# Altium PCB Tube03.PcbDoc (part 2 of 2)
Units mil, origin at the board's own origin, x right, y up, seen from the top; angles counter-clockwise.
Board outline 3701.35 x 3701.35 mil, 2 copper layers (Top Layer, Bottom Layer); 116 components, 79 nets, 440 pads, 68 vias.
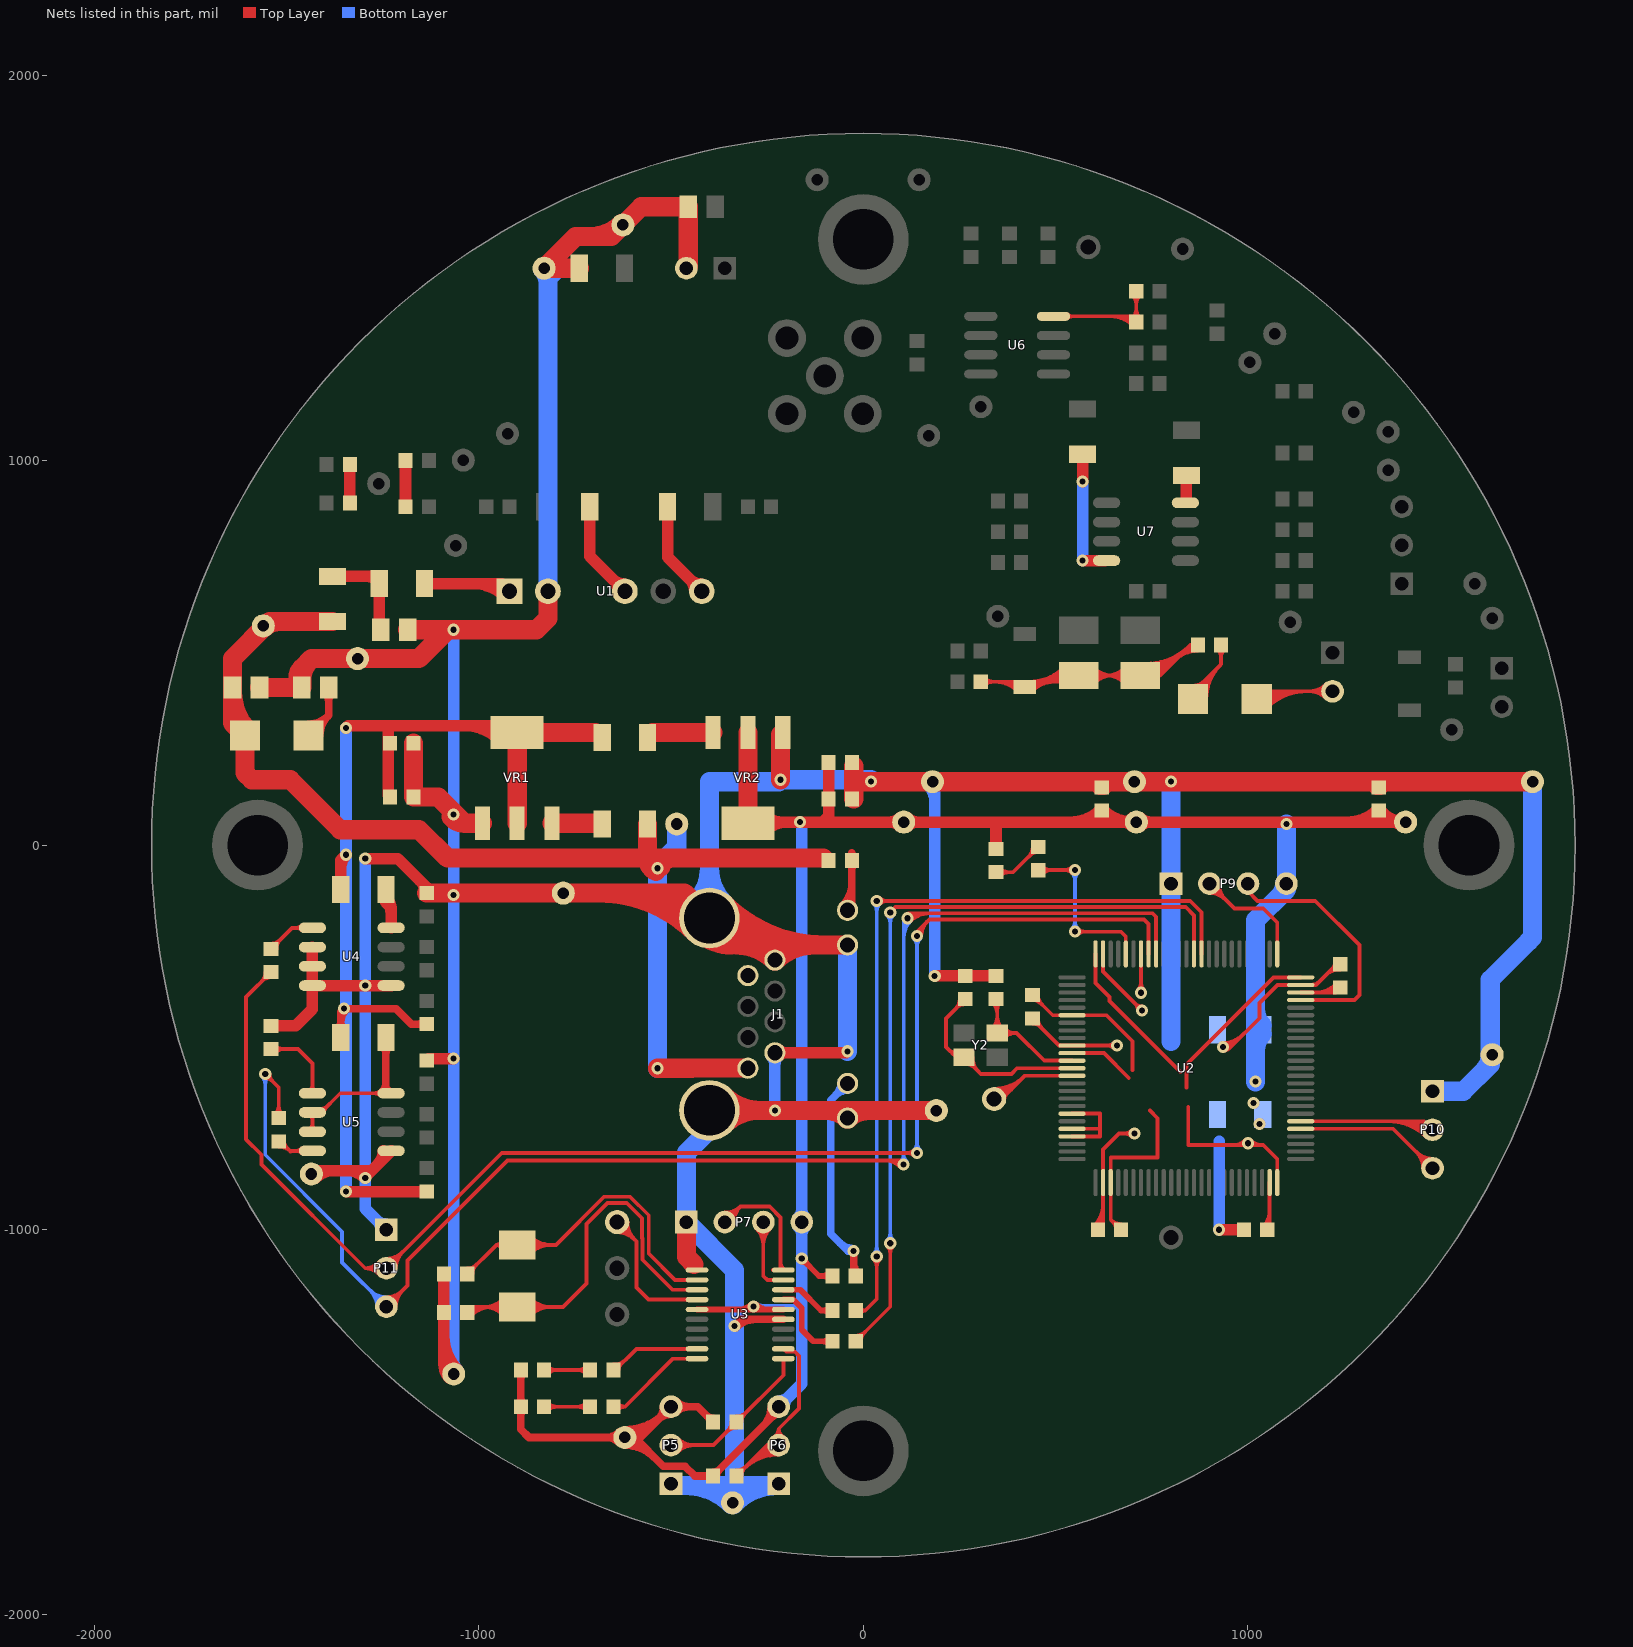
[diagram p2: the nets of this part, all layers, seen from the top]

## Via types
v1: diameter 31.5, hole 15.75, Top Layer to Bottom Layer, 68 vias

## Nets (pads, with @x,y where several pads share a name; then routed paths per layer and width w, separated by ;. In a path a pad name is that pad's centre, name@x,y a point inside that pad or via, vN(x,y) a via of type N, cw(c..) or ccw(c..) an arc to the next point about the centre after c; other vN are vias at no path point) (continued)
GND: C6.1 C7.1 C8.1 C9.1 C11.1 C13.1 C20.2 C21.2 C22.2 C23.2 C24.1 C25.1 C26.1 C27.1 C28.1 C29.1 C30.2 C31.2 FB1.1 J1.2 J1.8 J1.9 J1.11 J1.13 J1.14 P2.2 P5.1 P6.1 P7.1 P9.1 P10.1 P11.1 pad.0@1635,-545 pad.0@-830,1500 pad.1@-1065,-1375 pad.3@705,165 pad.4 pad.5 pad.6@-625.04,1612.52 pad.7@-340,-1710 pad.20 pad.22 R9.1 R10.1 R11.1 R14.1 R30.1 U1.2 U2.10 U2.27 U2.74 U2.94 U2.99 U3.1 U3.15 U4.2 U4.3 U4.4 U4.5 U5.5 VR1.1 VR2.1 | length 21622.8
  Top Layer w10: C21.2@440,-450.32 440,-451.78 509.17,-520.94 U2.10@542.76,-520.94 v1(660,-520.94) ; C21.2@440.98,-463.62 cw(c440.98,-489.85) 459.53,-471.3 ; C21.2@454.29,-450.32 ccw(c492.32,-450.32) 465.43,-477.21 ; 505.7,-517.48 ccw(c512.83,-510.34) U2.10@512.83,-520.43 ; C23.2@600.28,-989.61 ccw(c544.3,-933.63) 623.46,-933.63 ; C23.2@607.35,-996.68 ccw(c568.44,-957.77) 623.46,-957.77 ; C23.2@609.69,-1000 623.46,-986.22 U2.27@623.46,-877.24 623.46,-791.54 665,-750 v1(705,-750) ; C23.2@614.42,-1003.75 ccw(c592.58,-981.91) C23.2@623.46,-981.91 ; U2.99@623.46,-282.76 623.46,-328.46 v1(724.84,-429.84) ; v1@652.4,-528.54 ccw(c634.05,-546.89) 634.05,-520.94 ccw(c634.05,-495) v1@652.4,-513.34 ; v1@697.4,-757.6 ccw(c679.05,-775.95) 679.05,-750 ccw(c679.05,-724.05) v1@697.4,-742.4 ; v1@714.09,-429.84 ccw(c688.14,-429.84) 706.49,-411.49 ccw(c724.84,-393.14) v1@724.84,-419.09 ; v1@714.29,-376.08 ccw(c695.94,-357.73) 721.89,-357.73 ccw(c747.84,-357.73) v1@729.49,-376.08 ; v1(721.89,-383.68) U2.94@721.89,-282.76 ; v1@935,-534.25 ccw(c935,-508.3) 953.35,-526.65 ; v1(935,-525) 955,-525 ; v1@935,-524.25 ccw(c935,-474.16) 970.42,-509.58 ; v1@935,-514.25 ccw(c935,-440.02) 987.49,-492.51 ; v1@943.96,-530.93 cw(c955,-538.23) 955,-525 ; v1@943.96,-519.07 ccw(c955,-511.77) 955,-525 ; U2.74@1167.17,-362.95 ccw(c1167.17,-339.09) 1184.04,-355.96 ; 1201.45,-338.55 cw(c1239.02,-376.12) C27.1@1239.02,-322.99 ; 1218.52,-321.48 cw(c1239.02,-341.98) C27.1@1239.02,-312.99 ; C27.1@1222.45,-317.55 ccw(c1214.59,-309.68) C27.1@1225.71,-309.68 ; C27.1@1240,-309.68 1230.32,-309.68 1176.54,-363.46 U2.74@1137.24,-363.46 1076.54,-363.46 1030,-410 1030,-450 955,-525
  Top Layer w20: v1(-335,-1250) -317.8,-1232.8 U3.15@-207.8,-1232.8 ; v1@-330.94,-1254.06 cw(c-279.59,-1305.41) -279.59,-1232.8
  Top Layer w30: R10.1@-1540,-469.69 -1475.31,-469.69 -1432.36,-426.73 U4.4@-1432.36,-365 ; U4.2@-1432.36,-265 U4.3@-1432.36,-315 U4.4@-1432.36,-365 ; pad.5@-1424.39,-865.61 cw(c-1377.5,-912.5) -1377.5,-846.18 ; pad.5@-1423.82,-846.18 -1278.82,-846.18 ; -1342.24,-846.18 cw(c-1342.24,-912.24) v1@-1295.53,-865.53 ; v1(-1295,-865) -1295,-862.36 -1278.82,-846.18 ; v1(-1295,-35) -1210,-35 -1135,-110 R9.1@-1135,-124.69 ; -1262.52,-829.88 ccw(c-1297.4,-795) U5.5@-1248.07,-795 ; U5.5@-1227.64,-795 -1278.82,-846.18 ; U4.5@-1227.64,-365 v1(-1295,-365) U4.4@-1432.36,-365 ; -1152.71,-92.29 cw(c-1185.11,-124.69) R9.1@-1139.29,-124.69 ; R11.1@-1131.68,-562.02 cw(c-1114.72,-578.98) -1114.72,-555 ; R11.1@-1130.31,-555 v1(-1065,-555) ; -1090.31,-1350.1 ccw(c-1040.1,-1350.1) pad.1@-1075.61,-1385.61 ; -1090.31,-1277.67 ccw(c-967.67,-1277.67) pad.1@-1054.39,-1364.39 ; C29.1@-1090.31,-1115 C28.1@-1090.31,-1215 -1090.31,-1349.69 pad.1@-1065,-1375 ; J1.2@-229.92,-539.84 v1@-44.84,-539.84 ; J1.2@-221.04,-548.72 cw(c-199.6,-570.16) -199.6,-539.84 cw(c-199.6,-509.52) J1.2@-221.04,-530.96 ; v1(185.63,-340) 185.31,-339.69 C25.1@345,-339.69 ; v1(925,-1000) C26.1@989.68,-1000
  Top Layer w50: C13.1@-1569.96,410 R14.1@-1460.04,410 -1460.04,459.96 ; R14.1@-1462.2,416.03 cw(c-1369.2,419.2) -1435,485 ; R14.1@-1461.68,414.69 cw(c-1436.52,436.44) -1460.04,459.96 ; C11.1@-1184.96,560 v1@-1080,560 ; C7.1@-1169.68,265 C6.1@-1169.68,125 -1105,125 -1036.89,56.89 ; R9.1@-1135,-124.69 -464.76,-124.69 J1.14@-400,-189.45 -329.92,-259.53 ; v1@-1072.34,74.37 ccw(c-1036.89,101.58) -1036.89,56.89 ; v1@-1071.54,73.46 ccw(c-1031.54,113.46) -1031.54,56.89 ; VR1.1@-990.55,56.89 -1036.89,56.89 ; U1.2@-820,660 -820,590 -850,560 v1(-1065,560) v1@-1080,560 ; R30.1@-738.66,1500 pad.0@-830,1500 -747.81,1582.19 -655.36,1582.19 -577.55,1660 FB1.1@-455.04,1660 P2.2@-455.04,1504.96 ; -710.33,1582.19 ccw(c-710.33,1697.81) pad.6@-628.57,1616.05 ; -686.09,-124.69 cw(c-686.09,-475.54) J1.14@-438,-227.45 ; -565.38,-124.69 cw(c-565.38,-354.83) J1.14@-402.64,-192.09 ; P7.1@-460,-980 -460,-1070 -440,-1090 ; J1.14@-432.71,-222.16 ccw(c-342.49,-131.94) -342.49,-259.53 ; J1.13@-400,-689.45 pad.22@190,-690 ; J1.14@-397.36,-186.8 ccw(c-221.78,-11.23) -221.78,-259.53 ; J1.13@-362.04,-727.48 cw(c-270.38,-819.31) -270.26,-689.57 cw(c-270.14,-559.83) J1.13@-361.96,-651.48 ; J1.14@-362,-151.45 ccw(c-101.07,109.48) -101.07,-259.53 ; J1.8@-231.75,-300.69 ccw(c-329.91,-397.16) -329.91,-259.53 ; J1.8@-229.92,-298.9 -229.92,-259.61 ; J1.8@-228.11,-300.71 cw(c-128.7,-400.12) -128.7,-259.53 ; v1(-215,170) VR2.1@-215,287.56 ; -94.77,-689.73 cw(c-94.84,-763.32) J1.9@-42.76,-711.34 ; J1.11@-40.94,-259.53 -329.92,-259.53 ; J1.9@-39.14,-711.34 cw(c12.85,-763.42) 12.92,-689.83 ; C8.1@-25,120 -25,165 ; C9.1@-25,205 -25,165 ; 599.72,165 cw(c599.72,131.02) C20.2@623.75,155.05 ; C20.2@616.25,155.05 cw(c640.28,131.02) 640.28,165 ; 1319.72,165 cw(c1319.72,131.02) C22.2@1343.75,155.05 ; C22.2@1336.25,155.05 cw(c1360.28,131.02) 1360.28,165 ; pad.20@1740,165 v1(800,165) v1(20,165) -25,165 ; -1460.04,459.96 -1435,485 ; -1435,485 -1155,485 v1@-1080,560
  Bottom Layer w30: v1(-1295,-35) v1(-1295,-365) v1(-1295,-865) -1295,-945 P11.1@-1240,-1000 ; P11.1@-1254.53,-1000 ccw(c-1289.6,-1000) -1264.8,-975.2 ccw(c-1240,-950.4) P11.1@-1240,-985.47 ; pad.1@-1075.61,-1364.39 ccw(c-1101.21,-1338.79) -1065,-1338.79 ccw(c-1028.79,-1338.79) pad.1@-1054.39,-1364.39 ; pad.1@-1065,-1375 v1(-1065,-555) v1(-1065,-130) v1(-1065,80) v1(-1065,560) ; J1.2@-238.8,-548.72 cw(c-260.24,-570.16) -229.92,-570.16 cw(c-199.6,-570.16) J1.2@-221.04,-548.72 ; v1@-229.92,-689.92 J1.2@-229.92,-539.84 ; pad.4@169.39,154.39 cw(c130.2,115.2) 185.63,115.2 ; pad.4@185,165 185.63,164.37 v1(185.63,-340) ; v1(925,-1000) 925,-770
  Bottom Layer w50: pad.0@-833.54,1496.46 cw(c-866.21,1463.79) -820,1463.79 ; U1.2@-820,660 -820,1475 -795,1500 ; P5.1@-500,-1660 -495,-1665 -340,-1665 ; -460.71,-1665 cw(c-460.71,-1830.71) pad.7@-343.54,-1713.54 ; J1.14@-438,-151.45 ccw(c-529.74,-59.71) -400,-59.71 ccw(c-270.26,-59.71) J1.14@-362,-151.45 ; J1.13@-400,-689.45 -400,-740 -460,-800 P7.1@-460,-980 -335,-1105 v1(-335,-1250) -335,-1665 ; J1.14@-400,-189.45 -400,165 -220,165 v1(-215,170) v1@20,170 ; -372.91,-1679.31 cw(c-340,-1710) -340,-1665 ; pad.7@-340,-1710 -340,-1670 -335,-1665 ; pad.7@-336.34,-1713.41 cw(c-225.01,-1817.24) P6.1@-225.01,-1665 ; pad.7@-336.26,-1706.68 cw(c-313.49,-1686.51) -335,-1665 ; -308.18,-1678.18 ccw(c-340,-1710) -340,-1665 ; P6.1@-220,-1660 P6.1@-225,-1665 ; v1(-40.94,-535.94) J1.11@-40.94,-259.53 ; 800,-510 P9.1@800,-100 v1(800,165) ; P10.1@1480,-640 1560,-640 1630,-570 1630,-350 1730.22,-249.78 1730.22,-249.07 1740,-239.29 pad.20@1740,165 ; 1612.32,-587.68 ccw(c1569.64,-545) pad.0@1630,-545 ; -335,-1665 P6.1@-225,-1665
  other v1: -230,-690
LED1_030: D4.K U3.9 | length 293.9
  Top Layer w10: D4.K@-650.43,-1370.43 -640,-1360 -589.57,-1309.57 U3.9@-432.2,-1309.57 ; D4.K@-649.69,-1350.71 ccw(c-649.69,-1304.89) -617.29,-1337.29 ; D4.K@-636.38,-1364.02 cw(c-617.94,-1364.02) -630.98,-1350.98
LED1_407: D9.K U2.96 | length 651.1
  Top Layer w10: D9.K@455.31,-65 v1(550,-65) ; D9.K@465.39,-74.72 cw(c488.87,-98.2) 488.87,-65 ; D9.K@465.39,-55.9 ccw(c487.35,-33.95) 487.35,-65 ; v1@542.4,-72.6 ccw(c524.05,-90.95) 524.05,-65 ccw(c524.05,-39.05) v1@542.4,-57.4 ; v1(550,-225) 670,-225 682.52,-237.52 U2.96@682.52,-282.76 ; v1@557.6,-232.6 cw(c575.95,-250.95) 575.95,-225 cw(c575.95,-199.05) v1@557.6,-217.4
  Bottom Layer w10: v1@542.4,-217.4 ccw(c524.05,-199.05) 550,-199.05 ccw(c575.95,-199.05) v1@557.6,-217.4 ; v1@542.4,-72.6 cw(c524.05,-90.95) 550,-90.95 cw(c575.95,-90.95) v1@557.6,-72.6 ; v1(550,-225) v1(550,-65)
LED2_030: D7.K U3.10 | length 313.8
  Top Layer w10: D7.K@-649.69,-1460 -620,-1460 ; D7.K@-639.75,-1468.85 cw(c-620,-1486.46) -620,-1460 ; D7.K@-639.75,-1451.15 ccw(c-620,-1433.54) -620,-1460 ; U3.10@-432.2,-1335.16 -495.16,-1335.16 -620,-1460
LED_FB: J1.7
NetC1_1: C1.1 C3.2 U6.8 | length 554.7
  Top Layer w10: U6.8@494.49,1375 709.69,1375 C1.1@709.69,1435 ; U6.8@530.8,1370.18 cw(c542.43,1358.56) 542.43,1375 cw(c542.43,1391.44) U6.8@530.8,1379.82 ; 643.72,1375 cw(c643.72,1295.02) C3.2@700.27,1351.57 ; 667.86,1375 cw(c667.86,1319.16) C3.2@707.35,1358.65 ; C3.2@692.01,1375 cw(c692.01,1343.31) C3.2@714.42,1365.72 ; C3.2@694.68,1375 C3.2@709.68,1360 ; C3.2@700.27,1370.39 ccw(c677.55,1393.12) 709.69,1393.12 ccw(c741.81,1393.11) C3.2@719.09,1370.39 ; C1.1@700.28,1429.61 cw(c677.56,1406.89) 709.69,1406.89 cw(c741.81,1406.89) C1.1@719.1,1429.61
NetC11_2: C11.2 L1.1 R15.1 | length 298.4
  Top Layer w30: R15.1@-1380,698.66 -1277.32,698.66 L1.1@-1258.66,680 C11.2@-1258.66,563.62 ; -1289.36,698.66 cw(c-1289.36,662.49) L1.1@-1263.78,688.07 ; -1258.66,593.76 ccw(c-1227.38,593.76) C11.2@-1249.5,571.64
NetC18_1: C18.1 C19.1 D5.2 R31.2 R32.2 | length 2207.4
  Top Layer w10: R32.2@305.32,425 C18.1@544.06,425 ; R32.2@314.73,415.59 cw(c337.44,392.87) 337.44,425 cw(c337.44,457.13) R32.2@314.73,434.41 ; 343.94,425 cw(c343.94,346.85) D5.2@399.2,402.11 ; 368.08,425 cw(c368.08,370.99) D5.2@406.27,409.18 ; D5.2@392.22,425 cw(c392.22,395.13) D5.2@413.34,416.25 ; D5.2@426.66,416.25 cw(c447.78,395.13) D5.2@447.78,425 ; D5.2@432.29,425 ccw(c432.29,552.91) C18.1@522.73,462.46 ; D5.2@433.73,409.18 cw(c471.92,370.99) 471.92,425 ; D5.2@440.8,402.11 cw(c496.06,346.85) 496.06,425 ; 456.43,425 ccw(c456.43,528.77) C18.1@529.8,455.39 ; 480.57,425 ccw(c480.57,504.62) C18.1@536.87,448.32 ; 504.71,425 ccw(c504.71,480.48) C18.1@543.95,441.25 ; C18.1@509.27,425 cw(c509.27,405.96) C18.1@522.73,419.42 ; C18.1@560,440.94 C19.1@720,440.94 770.94,440.94 850,520 ; C18.1@590.2,426.5 cw(c625.08,391.61) 625.08,440.94 cw(c625.08,490.27) C18.1@590.2,455.39 ; C18.1@597.27,419.42 cw(c649.22,367.47) 649.22,440.94 cw(c649.22,514.42) C18.1@597.27,462.46 ; C19.1@682.73,419.42 ccw(c630.78,367.47) 630.78,440.94 ccw(c630.78,514.42) C19.1@682.73,462.46 ; C19.1@689.8,426.5 ccw(c654.92,391.61) 654.92,440.94 ccw(c654.92,490.27) C19.1@689.8,455.39 ; C19.1@735.75,431.38 ccw(c735.75,493.25) 779.5,449.5 ; C19.1@735.75,441.38 ccw(c735.75,527.39) 796.57,466.57 ; C19.1@735.75,451.38 ccw(c735.75,561.53) 813.64,483.64 ; C19.1@735.75,461.38 ccw(c735.75,595.68) 830.71,500.71 ; C19.1@735.75,471.38 ccw(c735.75,629.82) 847.78,517.78 ; 811.68,481.68 cw(c869.68,423.69) R31.2@869.68,505.71 ; 828.76,498.76 cw(c869.68,457.83) R31.2@869.68,515.71 ; 840.16,510.16 cw(c850.44,499.88) R31.2@860.49,510.38 ; 845.83,515.83 cw(c869.68,491.97) R31.2@869.68,525.71 ; 847.39,517.39 cw(c857.51,507.27) R31.2@867.4,517.61 ; R31.2@857.34,515.04 ccw(c850,512.1) 850,520 ; R31.2@857.34,524.96 cw(c850,527.9) 850,520 ; R31.2@869.68,520 850,520
NetC26_2: C26.2 U2.49 | length 185.7
  Top Layer w10: C26.2@1040.9,-989.61 ccw(c1003.17,-951.87) 1056.54,-951.87 ; C26.2@1047.98,-996.68 ccw(c1027.31,-976.01) 1056.54,-976.01 ; C26.2@1050.31,-1000 C26.2@1053.36,-996.95 ; C26.2@1056.54,-993.78 U2.49@1056.54,-877.24
NetC27_2: C27.2 U2.73 | length 230.1
  Top Layer w10: U2.73@1137.24,-383.15 1227.16,-383.15 C27.2@1240,-370.31 ; 1175.9,-383.15 ccw(c1175.9,-307.2) C27.2@1229.61,-360.9 ; 1200.04,-383.15 ccw(c1200.04,-331.34) C27.2@1236.68,-367.98 ; C27.2@1224.19,-383.15 ccw(c1224.19,-355.48) C27.2@1243.75,-375.05
NetD1_1: D1.1 R14.2 | length 306.7
  Top Layer w20: D1.1@-1442.32,285 -1389.96,337.36 R14.2@-1389.96,410 ; D1.1@-1442.32,314.37 ccw(c-1442.32,385.28) -1392.18,335.14 ccw(c-1342.05,285) D1.1@-1412.95,285 ; R14.2@-1399.04,394.82 cw(c-1420.95,372.91) -1389.96,372.91 cw(c-1358.97,372.91) R14.2@-1380.88,394.82
NetD2_K: D2.K R17.1 | length 100
  Top Layer w30: R17.1@-1334.69,890 D2.K@-1334.69,990
NetD3_A: D3.A R16.1 | length 100
  Top Layer w30: D3.A@-1190.32,895 R16.1@-1190.32,995
NetD4_A: D4.A R35.1 | length 220.3
  Top Layer w10: R35.1@-829.69,-1365 D4.A@-710.32,-1365 ; R35.1@-820.28,-1374.41 cw(c-797.56,-1397.13) -797.56,-1365 cw(c-797.56,-1332.87) R35.1@-820.28,-1355.59 ; D4.A@-719.73,-1374.41 ccw(c-742.44,-1397.13) -742.44,-1365 ccw(c-742.44,-1332.87) D4.A@-719.73,-1355.59
NetD7_A: D7.A R36.1 | length 220.3
  Top Layer w10: R36.1@-829.69,-1460 D7.A@-710.32,-1460 ; R36.1@-820.28,-1469.41 cw(c-797.56,-1492.13) -797.56,-1460 cw(c-797.56,-1427.87) R36.1@-820.28,-1450.59 ; D7.A@-719.73,-1469.41 ccw(c-742.44,-1492.13) -742.44,-1460 ccw(c-742.44,-1427.87) D7.A@-719.73,-1450.59
NetD8_1: D8.1 P3.2 | length 741.4
  Top Layer w10: D8.1@1018.7,383.98 cw(c1057.37,345.31) 1057.37,400 cw(c1057.37,414.69) D8.1@1046.98,404.3 ; D8.1@1025.77,376.91 cw(c1081.51,321.17) 1081.51,400 ; D8.1@1032.84,369.84 cw(c1105.65,297.02) 1105.65,400 ; D8.1@1039.91,362.77 cw(c1129.8,272.88) 1129.8,400 ; D8.1@1042.68,400 P3.2@1220,400 ; D8.1@1046.98,355.7 cw(c1153.94,248.74) 1153.94,400 ; P3.2@1202.66,382.66 ccw(c1160.79,340.79) 1160.79,400 ccw(c1160.79,459.21) P3.2@1202.66,417.34 ; P3.2@1209.73,389.73 ccw(c1184.93,364.93) 1184.93,400 ccw(c1184.93,435.07) P3.2@1209.73,410.27
NetD8_2: D8.2 R31.1 | length 531.3
  Top Layer w10: D8.2@857.32,380 857.32,397.32 930.31,470.31 R31.1@930.31,520 ; D8.2@857.32,414.37 ccw(c857.32,455.53) 886.42,426.42 ; D8.2@861.69,380 cw(c914.06,380) D8.2@877.03,417.03 ; D8.2@871.69,380 cw(c948.2,380) 894.1,434.1 ; D8.2@881.69,380 cw(c982.35,380) 911.17,451.17 ; D8.2@891.69,380 cw(c1016.49,380) 928.24,468.24 ; R31.1@920.9,509.61 cw(c898.19,486.89) 930.31,486.89 cw(c962.44,486.89) R31.1@939.72,509.61
NetD9_A: D9.A R43.1 | length 238.1
  Top Layer w10: R43.1@345,-70.31 389.37,-70.31 D9.A@455,-4.68 ; R43.1@355.39,-79.72 cw(c378.11,-102.44) 378.11,-70.31 cw(c378.11,-38.19) R43.1@355.39,-60.9 ; 430.6,-29.08 ccw(c406.21,-4.68) D9.A@440.71,-4.68 ; 432.98,-26.7 cw(c454.02,-47.74) D9.A@454.02,-17.99
NetJ1_10: J1.10 R18.1 | length 683.1
  Top Layer w20: R18.1@-25,-1114.69 v1(-25,-1055) ; -25,-1086.13 ccw(c13.2,-1086.13) R18.1@-13.81,-1113.14
  Bottom Layer w20: -60.42,-1034.58 ccw(c-25,-999.16) v1@-25,-1049.25 ; J1.10@-58.5,-619.37 cw(c-100.89,-619.37) -70.92,-649.35 cw(c-40.94,-679.32) J1.10@-40.94,-636.93 ; J1.10@-40.94,-619.37 -85,-663.43 -85,-1010 -40,-1055 v1(-25,-1055)
NetJ1_12: J1.12 R19.1 | length 278
  Top Layer w20: J1.12@-53.36,-156.95 ccw(c-110.51,-99.8) -29.69,-99.8 ; J1.12@-40.94,-169.37 -29.69,-158.11 -29.69,-20 ; R19.1@-35.56,-46.86 cw(c-49.74,-61.04) -29.69,-61.04 cw(c-9.63,-61.04) R19.1@-23.81,-46.86 ; R19.1@-35.33,-32.92 ccw(c-47.29,-20) -29.69,-20 ; R19.1@-24.04,-32.92 cw(c-12.08,-20) -29.69,-20
NetL1_2: L1.2 U1.1 | length 290
  Top Layer w30: L1.2@-1141.34,680 U1.1@-940,680 ; -1012.86,680 cw(c-1012.86,567.14) U1.1@-933.06,646.94
NetL2_1: L2.1 U1.6 | length 326.7
  Top Layer w30: L2.1@-508.66,880 -508.66,748.66 U1.6@-420,660 ; U1.6@-438.46,660 ccw(c-483.04,660) -451.52,691.52 ccw(c-420,723.04) U1.6@-420,678.46
NetL3_1: L3.1 U1.4 | length 327.9
  Top Layer w30: L3.1@-711.34,880 -711.34,751.34 U1.4@-620,660 ; U1.4@-638.46,660 ccw(c-683.04,660) -651.52,691.52 ccw(c-620,723.04) U1.4@-620,678.46
NetR10_2: R10.2 U5.1 | length 284.2
  Top Layer w10: R10.2@-1540,-530.32 -1469.68,-530.32 -1432.36,-567.64 U5.1@-1432.36,-645 ; R10.2@-1529.61,-539.73 cw(c-1506.89,-562.44) -1506.89,-530.32 cw(c-1506.89,-498.19) R10.2@-1529.61,-520.91 ; U5.1@-1438.57,-638.79 ccw(c-1453.56,-623.8) -1432.36,-623.8 ccw(c-1411.17,-623.8) U5.1@-1426.15,-638.79
NetR12_2: R12.2 VR1.3 | length 128.9
  Top Layer w50: VR1.3@-809.45,56.89 R12.2@-680.55,56.89
NetR13_2: R13.2 VR2.3 | length 157.7
  Top Layer w50: R13.2@-548.23,293.11 VR2.3@-390.55,293.11
NetR25_2: R25.2 U4.8 | length 193
  Top Layer w30: R25.2@-1246.46,-133.31 cw(c-1291.9,-178.75) -1227.64,-178.75 ; R25.2@-1245.04,-134.42 cw(c-1263.22,-165) -1227.64,-165 ; R25.2@-1241.34,-115 -1241.34,-148.66 -1227.64,-162.36 U4.8@-1227.64,-215
NetR26_2: R26.2 U5.2 U5.3 U5.8 | length 634.2
  Top Layer w10: U5.3@-1438.57,-738.79 ccw(c-1453.56,-723.8) -1432.36,-723.8 ccw(c-1411.17,-723.8) U5.3@-1426.15,-738.79 ; U5.2@-1438.57,-701.21 cw(c-1453.56,-716.2) -1432.36,-716.2 cw(c-1411.17,-716.2) U5.2@-1426.15,-701.21 ; U5.3@-1432.36,-745 U5.2@-1432.36,-695 -1410,-695 -1360,-645 U5.8@-1227.64,-645 ; U5.2@-1410.71,-686.22 ccw(c-1410.71,-663.31) -1394.51,-679.51 ; U5.2@-1401.93,-695 cw(c-1382.44,-695) -1396.22,-681.22 ; U5.8@-1255.5,-651.21 ccw(c-1270.49,-666.2) -1270.49,-645 ccw(c-1270.49,-623.8) U5.8@-1255.5,-638.79
  Top Layer w20: U5.8@-1251.96,-642.33 ccw(c-1277.62,-616.67) -1241.34,-616.67 ; R26.2@-1250,-521.85 cw(c-1270.9,-542.75) -1241.34,-542.75 cw(c-1211.78,-542.75) R26.2@-1232.68,-521.85 ; R26.2@-1241.34,-500 -1241.34,-631.3 U5.8@-1227.64,-645
NetR28_2: R28.2 U7.4 | length 334
  Top Layer w30: v1(570,740) U7.4@627.64,740 ; v1(570,945) R28.2@570,1016.34
  Bottom Layer w30: v1(570,740) v1(570,945)
NetR29_2: R29.2 U7.8 | length 68.7
  Top Layer w30: U7.8@840,892.64 R29.2@840,961.34
NRST_030: T1.1 U3.4 | length 524.6
  Top Layer w10: T1.1@-640,-1006.5 cw(c-640,-1070.46) -594.77,-1025.23 cw(c-549.54,-980) T1.1@-613.5,-980 ; T1.1@-640,-996.5 cw(c-640,-1036.32) -611.84,-1008.16 cw(c-583.68,-980) T1.1@-623.5,-980 ; T1.1@-640,-980 -590,-1030 -590,-1150 -558.39,-1181.61 U3.4@-432.2,-1181.61
NRST_407: T5.1 U2.14 | length 447.7
  Top Layer w10: T5.1@340,-660 360,-660 420.32,-599.68 U2.14@542.76,-599.68 ; T5.1@340,-653.5 ccw(c340,-589.54) 385.23,-634.77 ; T5.1@340,-643.5 ccw(c340,-555.39) 402.3,-617.7 ; T5.1@340,-633.5 ccw(c340,-521.25) 419.37,-600.63 ; T5.1@366.5,-660 cw(c382.18,-660) 371.09,-648.91
PA5_030: P5.2 R4.1 U3.11 | length 659.5
  Top Layer w10: P5.2@-500,-1560 -389.69,-1560 R4.1@-329.69,-1500 -207.8,-1378.11 U3.11@-207.8,-1335.16 ; P5.2@-489.73,-1570.27 cw(c-464.93,-1595.07) -464.93,-1560 cw(c-464.93,-1524.93) P5.2@-489.73,-1549.73 ; P5.2@-482.66,-1577.34 cw(c-440.79,-1619.21) -440.79,-1560 cw(c-440.79,-1500.79) P5.2@-482.66,-1542.66 ; -354.08,-1524.4 cw(c-329.69,-1548.79) R4.1@-329.69,-1514.29 ; -351.71,-1522.02 ccw(c-372.74,-1500.98) R4.1@-342.99,-1500.98 ; R4.1@-329.69,-1485.71 ccw(c-329.69,-1451.21) -305.29,-1475.6 ; R4.1@-316.38,-1499.02 cw(c-286.63,-1499.02) -307.67,-1477.98
PA6_030: P6.2 R5.1 U3.12 | length 853.2
  Top Layer w10: R5.1@-329.69,-1640 -249.69,-1560 P6.2@-220,-1560 -220,-1517.31 ; R5.1@-329.69,-1625.71 ccw(c-329.69,-1591.21) -305.29,-1615.6 ; R5.1@-316.38,-1639.02 cw(c-286.63,-1639.02) -307.67,-1617.98 ; R5.1@-312.55,-1622.86 cw(c-220,-1715.41) P6.2@-220,-1584.53 ; -295.48,-1605.79 cw(c-220,-1681.27) P6.2@-220,-1574.53 ; -278.41,-1588.72 cw(c-220,-1647.13) P6.2@-220,-1564.53 ; -261.34,-1571.65 cw(c-220,-1612.98) P6.2@-220,-1554.53 ; P6.2@-232.35,-1538.81 ccw(c-244.88,-1517.32) -220,-1517.32 ; U3.12@-207.8,-1309.57 -200.09,-1317.27 -177.75,-1317.27 -167.27,-1327.75 -167.27,-1464.58 -220,-1517.31 ; P6.2@-207.65,-1538.81 cw(c-195.12,-1517.32) -220,-1517.32 ; U3.12@-192.53,-1312.94 ccw(c-185.79,-1309.86) -185.79,-1317.27
PF0_030: C29.2 U3.2 Y1.1 | length 1122.1
  Top Layer w10: C29.2@-1029.68,-1115 -953.98,-1039.29 Y1.1@-900,-1039.29 -799.29,-1039.29 -674,-914 -606.37,-914 -558,-962.37 -558,-1062 -489.57,-1130.43 U3.2@-432.2,-1130.43 ; C29.2@-1029.68,-1100.71 ccw(c-1029.68,-1066.21) -1005.29,-1090.6 ; C29.2@-1016.38,-1114.02 cw(c-986.63,-1114.02) -1007.66,-1092.98 ; Y1.1@-940.76,-1049 ccw(c-953.97,-1053.15) -953.97,-1039.29 ccw(c-953.97,-1025.44) Y1.1@-940.76,-1029.59 ; Y1.1@-874.32,-1055.13 cw(c-836.08,-1093.37) -836.08,-1039.29 cw(c-836.08,-985.21) Y1.1@-874.32,-1023.45 ; Y1.1@-867.25,-1062.2 cw(c-811.93,-1117.52) -811.93,-1039.29 cw(c-811.93,-961.07) Y1.1@-867.25,-1016.38
PF1_030: C28.2 U3.3 Y1.2 | length 1504.2
  Top Layer w10: C28.2@-1034.42,-1209.28 cw(c-1013.71,-1229.99) C28.2@-1013.71,-1200.71 ; C28.2@-1029.68,-1215 -1015.39,-1200.71 Y1.2@-900,-1200.71 -780.71,-1200.71 -720,-1140 -720,-985 -665,-930 -615,-930 -575,-970 -575,-1021.37 -574,-1022.37 -574,-1078.05 -496.02,-1156.02 U3.3@-432.2,-1156.02 ; C28.2@-1027.35,-1216.35 cw(c-989.57,-1254.13) -989.57,-1200.71 ; C28.2@-1020.27,-1223.43 cw(c-965.43,-1278.27) -965.43,-1200.71 ; Y1.2@-932.75,-1223.62 ccw(c-988.07,-1278.93) -988.07,-1200.71 ccw(c-988.07,-1122.48) Y1.2@-932.75,-1177.8 ; Y1.2@-925.68,-1216.55 ccw(c-963.92,-1254.79) -963.92,-1200.71 ccw(c-963.92,-1146.63) Y1.2@-925.68,-1184.87 ; Y1.2@-874.32,-1216.55 cw(c-836.08,-1254.79) -836.08,-1200.71 cw(c-836.08,-1146.63) Y1.2@-874.32,-1184.87 ; Y1.2@-867.25,-1223.62 cw(c-811.93,-1278.93) -811.93,-1200.71 cw(c-811.93,-1122.48) Y1.2@-867.25,-1177.8
PH0_407: C25.2 U2.12 Y2.3 | length 493.3
  Top Layer w10: Y2.3@335.84,-476.03 ccw(c305.73,-445.92) 348.31,-445.92 ccw(c390.89,-445.92) Y2.3@360.78,-476.03 ; C25.2@336.57,-409.73 cw(c308.25,-438.05) 348.31,-438.05 ; 348.31,-426.83 cw(c372.5,-426.83) C25.2@355.39,-409.73 ; C25.2@348.31,-403.62 Y2.3@348.31,-488.5 398.5,-488.5 470.31,-560.31 U2.12@542.76,-560.31 ; Y2.3@365.7,-500.98 cw(c395.81,-531.09) 395.81,-488.5 cw(c395.81,-445.92) Y2.3@365.7,-476.03
PH1_407: C24.2 U2.13 Y2.1 | length 700
  Top Layer w10: 222.64,-532.64 ccw(c237.68,-517.6) Y2.1@248.11,-536.13 ; 231.96,-541.96 ccw(c244.39,-529.52) Y2.1@253.02,-544.84 ; 240.6,-424.71 ccw(c216.21,-400.32) C24.2@250.71,-400.32 ; 242.98,-422.34 cw(c264.02,-443.37) C24.2@264.02,-413.62 ; C24.2@265,-400.32 215,-450.32 215,-525 241.5,-551.5 Y2.1@261.69,-551.5 305.2,-595 385,-595 400,-580 U2.13@542.76,-580 ; Y2.1@266.62,-569.13 cw(c266.62,-599.83) 288.32,-578.13 ; Y2.1@274.25,-551.5 ccw(c304.57,-551.5) Y2.1@283.13,-572.94 ; Y2.1@284.25,-551.5 ccw(c338.72,-551.5) 300.2,-590.01
SWCLK_030: P7.2 U3.20 | length 504.7
  Top Layer w10: P7.2@-360,-980 -319.47,-939.47 ; P7.2@-359.66,-965.48 ccw(c-358.9,-933.09) -336,-956 ccw(c-313.09,-978.9) P7.2@-345.48,-979.66 ; P7.2@-359.43,-955.48 ccw(c-358.15,-900.8) -319.47,-939.47 ; P7.2@-335.48,-979.43 cw(c-280.8,-978.15) -319.47,-939.47 ; U3.20@-235.16,-1104.84 U3.20@-207.8,-1104.84 -215,-1097.64 -215,-967.69 -243.21,-939.47 -319.47,-939.47 ; -215,-1082.89 ccw(c-185.84,-1082.89) U3.20@-206.46,-1103.51
SWCLK_407: P9.2 U2.76 | length 447.8
  Top Layer w10: P9.2@900,-124.53 cw(c900,-183.74) 941.87,-141.87 cw(c983.74,-100) P9.2@924.53,-100 ; P9.2@900,-114.53 cw(c900,-149.6) 924.8,-124.8 cw(c949.6,-100) P9.2@914.53,-100 ; P9.2@900,-100 965,-165 1040,-165 1076.22,-201.22 U2.76@1076.22,-282.76
SWDIO_030: P7.3 U3.19 | length 369.3
  Top Layer w10: P7.3@-277.34,-997.34 cw(c-319.21,-1039.21) -260,-1039.21 cw(c-200.79,-1039.21) P7.3@-242.66,-997.34 ; P7.3@-270.27,-990.27 cw(c-295.07,-1015.07) -260,-1015.07 cw(c-224.93,-1015.07) P7.3@-249.73,-990.27 ; P7.3@-260,-1004.7 P7.3@-260,-980 -260,-1120 -249.57,-1130.43 U3.19@-207.8,-1130.43
SWDIO_407: P9.3 U2.72 | length 656.1
  Top Layer w10: P9.3@1000,-100 1000,-120 1025,-145 1175,-145 1290,-260 1290,-390 1277.17,-402.83 U2.72@1137.24,-402.83
U1R_030: R23.2 U3.18 | length 190.8
  Top Layer w15: U3.18@-207.8,-1156.02 -163.98,-1156.02 -110,-1210 R23.2@-80.32,-1210 ; R23.2@-87.96,-1217.64 ccw(c-106.41,-1236.09) -106.41,-1210 ccw(c-106.41,-1183.91) R23.2@-87.96,-1202.36
U1R_407: P11.2 R41.2 U2.93 | length 4278.9
  Top Layer w10: -1564.17,-354.17 ccw(c-1588.03,-330.32) R41.2@-1554.29,-330.32 ; -1562.56,-352.56 cw(c-1540.98,-374.14) R41.2@-1540.98,-343.62 ; R41.2@-1540,-330.32 -1540.32,-330.32 -1605,-395 -1605,-764.85 -1565,-804.85 -1565,-830 -1295,-1100 ; P11.2@-1258.25,-1116.39 ccw(c-1295,-1149.39) -1295,-1100 ; P11.2@-1258.25,-1083.61 cw(c-1295,-1050.61) -1295,-1100 ; P11.2@-1250.81,-1109.71 ccw(c-1272.57,-1129.26) -1272.57,-1100 ccw(c-1272.57,-1070.74) P11.2@-1250.81,-1090.29 ; P11.2@-1240,-1085.47 ccw(c-1240,-1050.4) -1215.2,-1075.2 ccw(c-1190.4,-1100) P11.2@-1225.47,-1100 ; P11.2@-1240,-1075.47 ccw(c-1240,-1016.26) -1198.13,-1058.13 ccw(c-1156.26,-1100) P11.2@-1215.47,-1100 ; v1@132.4,-807.6 ccw(c114.05,-825.95) 114.05,-800 ccw(c114.05,-774.05) v1@132.4,-792.4 ; v1@134.41,-230.59 172,-193 730,-193 741.57,-204.57 U2.93@741.57,-282.76 ; v1(140,-800) -940,-800 P11.2@-1240,-1100 -1295,-1100 ; v1@140.75,-236.18 cw(c169.54,-236.18) 149.18,-215.82 ; v1@150.75,-236.18 cw(c203.69,-236.18) 166.25,-198.75
  Bottom Layer w10: v1@132.4,-792.4 ccw(c114.05,-774.05) 140,-774.05 ccw(c165.95,-774.05) v1@147.6,-792.4 ; v1@132.4,-243.78 cw(c114.05,-262.13) 140,-262.13 cw(c165.95,-262.13) v1@147.6,-243.78 ; v1@134.41,-230.59 v1(140,-236.18) v1(140,-800)
U1RX: R41.1 U4.1 | length 214
  Top Layer w10: R41.1@-1540,-269.69 -1485.31,-215 U4.1@-1432.36,-215 ; R41.1@-1539.02,-256.38 ccw(c-1539.02,-226.63) -1517.98,-247.67 ; R41.1@-1525.71,-269.69 cw(c-1491.21,-269.69) -1515.6,-245.29 ; U4.1@-1460.22,-221.21 ccw(c-1475.21,-236.2) -1475.21,-215 ccw(c-1475.21,-193.8) U4.1@-1460.22,-208.79
U1T_030: R24.2 U3.17 | length 246.4
  Top Layer w15: U3.17@-207.8,-1181.61 -181.91,-1181.61 -160,-1203.53 -160,-1260 -130,-1290 R24.2@-80.32,-1290 ; R24.2@-87.96,-1297.64 ccw(c-106.41,-1316.09) -106.41,-1290 ccw(c-106.41,-1263.91) R24.2@-87.96,-1282.36
U1T_407: P11.3 R42.2 U2.92 | length 4533.3
  Top Layer w10: v1@-1555,-605.75 cw(c-1555,-631.7) -1536.65,-613.35 cw(c-1518.3,-595) v1@-1544.25,-595 ; v1(-1555,-595) -1520,-630 R42.2@-1520,-709.68 ; R42.2@-1529.41,-700.27 ccw(c-1552.13,-677.56) -1520,-677.56 ccw(c-1487.87,-677.56) R42.2@-1510.59,-700.27 ; P11.3@-1240,-1200 -1185,-1145 -1185,-1080 -925,-820 95,-820 v1(105,-830) ; P11.3@-1240,-1185.47 ccw(c-1240,-1150.4) -1215.2,-1175.2 ccw(c-1190.4,-1200) P11.3@-1225.47,-1200 ; P11.3@-1240,-1175.47 ccw(c-1240,-1116.26) -1198.13,-1158.13 ccw(c-1156.26,-1200) P11.3@-1215.47,-1200 ; 54.91,-820 cw(c54.91,-880.09) v1@97.4,-837.6 ; 79.05,-820 cw(c79.05,-855.95) v1@104.47,-830.53 ; v1@108.46,-183.46 cw(c124.05,-199.05) 124.05,-177 ; v1(115,-190) 128,-177 752,-177 761.26,-186.26 U2.92@761.26,-282.76 ; v1@115.53,-190.53 cw(c148.19,-223.19) 148.19,-177 ; v1@122.6,-197.6 cw(c172.33,-247.33) 172.33,-177
  Bottom Layer w10: v1@-1562.6,-602.6 cw(c-1580.95,-620.95) -1555,-620.95 cw(c-1529.05,-620.95) v1@-1547.4,-602.6 ; v1(-1555,-595) -1555,-805 -1355,-1005 -1355,-1085 P11.3@-1240,-1200 ; P11.3@-1264.53,-1200 ccw(c-1323.74,-1200) -1281.87,-1158.13 ccw(c-1240,-1116.26) P11.3@-1240,-1175.47 ; P11.3@-1254.53,-1200 ccw(c-1289.6,-1200) -1264.8,-1175.2 ccw(c-1240,-1150.4) P11.3@-1240,-1185.47 ; v1@97.4,-822.4 ccw(c79.05,-804.05) 105,-804.05 ccw(c130.95,-804.05) v1@112.6,-822.4 ; v1(105,-830) 105,-192.25 107.25,-190 107.25,-187.75 v1@107.5,-187.75 ; 105,-240.09 cw(c165.09,-240.09) v1@122.6,-197.6 ; 105,-215.95 cw(c140.95,-215.95) v1@115.53,-190.53
U1TX: R42.1 U5.4 | length 181.6
  Top Layer w10: R42.1@-1520,-770.31 -1514.69,-770.31 -1490,-795 U5.4@-1432.36,-795 ; R42.1@-1519.02,-783.62 cw(c-1519.02,-826.2) -1488.91,-796.09 ; R42.1@-1505.71,-770.31 ccw(c-1484.04,-770.31) -1499.36,-785.64 ; U5.4@-1460.22,-801.21 ccw(c-1475.21,-816.2) -1475.21,-795 ccw(c-1475.21,-773.8) U5.4@-1460.22,-788.79
U2R_407: R24.1 U2.87 | length 2229.6
  Top Layer w10: R24.1@-19.69,-1290 70,-1200.31 v1(70,-1035) ; R24.1@-19.69,-1275.71 ccw(c-19.69,-1241.21) 4.71,-1265.6 ; R24.1@-6.38,-1289.02 cw(c23.37,-1289.02) 2.33,-1267.98 ; v1@62.4,-1042.6 cw(c44.05,-1060.95) 70,-1060.95 cw(c95.95,-1060.95) v1@77.6,-1042.6 ; v1(70,-175) 84,-161 838.24,-161 859.69,-182.44 U2.87@859.69,-282.76
  Bottom Layer w10: v1@62.4,-1027.4 ccw(c44.05,-1009.05) 70,-1009.05 ccw(c95.95,-1009.05) v1@77.6,-1027.4 ; v1@62.4,-182.6 cw(c44.05,-200.95) 70,-200.95 cw(c95.95,-200.95) v1@77.6,-182.6 ; v1(70,-1035) v1(70,-175)
U2T_407: R23.1 U2.86 | length 2262.2
  Top Layer w10: R23.1@-19.69,-1210 5,-1210 ; R23.1@-8.57,-1217.31 cw(c5,-1226.24) 5,-1210 ; R23.1@-8.57,-1202.69 ccw(c5,-1193.76) 5,-1210 ; v1@27.4,-1077.6 cw(c9.05,-1095.95) 35,-1095.95 cw(c60.95,-1095.95) v1@42.6,-1077.6 ; v1(35,-1070) 35,-1180 5,-1210 ; v1(35,-145) 850,-145 879.37,-174.37 U2.86@879.37,-282.76 ; v1@42.6,-152.6 cw(c60.95,-170.95) 60.95,-145 cw(c60.95,-119.05) v1@42.6,-137.4
  Bottom Layer w10: v1@27.4,-1062.4 ccw(c9.05,-1044.05) 35,-1044.05 ccw(c60.95,-1044.05) v1@42.6,-1062.4 ; v1@27.4,-152.6 cw(c9.05,-170.95) 35,-170.95 cw(c60.95,-170.95) v1@42.6,-152.6 ; v1(35,-1070) v1(35,-145)
U3R_407: P10.2 U2.56 | length 662.4
  Top Layer w10: U2.56@1137.24,-717.8 1457.8,-717.8 P10.2@1480,-740 ; 1367.18,-717.8 cw(c1367.18,-852.82) P10.2@1462.66,-757.34 ; 1391.32,-717.8 cw(c1391.32,-828.68) P10.2@1469.73,-750.27 ; 1415.46,-717.8 cw(c1415.46,-804.54) P10.2@1476.8,-743.2 ; 1439.61,-717.8 cw(c1439.61,-780.39) P10.2@1483.87,-736.13
U3T_407: P10.3 U2.55 | length 533.3
  Top Layer w10: U2.55@1137.24,-737.48 1377.48,-737.48 P10.3@1480,-840 ; P10.3@1455.47,-840 ccw(c1396.26,-840) 1438.13,-798.13 ccw(c1480,-756.26) P10.3@1480,-815.47 ; P10.3@1465.47,-840 ccw(c1430.4,-840) 1455.2,-815.2 ccw(c1480,-790.4) P10.3@1480,-825.47
V3.3: C8.2 C9.2 C20.1 C21.1 C22.1 C23.1 C30.1 C31.1 P5.3 P6.3 P7.4 P9.4 pad.1@105,60 pad.2@710,60 pad.6@-620,-1540 pad.21 R4.2 R5.2 R18.2 R35.2 R36.2 R43.2 U2.6 U2.11 U2.19 U2.21 U2.22 U2.28 U2.50 U2.75 U2.100 U3.5 U3.16 VR2.2 | length 10956
  Top Layer w10: C21.1@440,-389.69 492.52,-442.2 U2.6@542.76,-442.2 ; C21.1@440.98,-402.99 cw(c440.98,-432.74) 462.02,-411.71 ; C21.1@454.29,-389.69 ccw(c488.79,-389.69) 464.4,-414.08 ; U2.22@542.76,-757.17 615,-757.17 615,-698.11 U2.19@542.76,-698.11 ; U2.21@542.76,-737.48 612.52,-737.48 ; U2.11@542.76,-540.63 625.63,-540.63 690,-605 ; U2.6@562.76,-442.2 632.2,-442.2 700,-510 700,-585 ; U2.100@603.78,-282.76 603.78,-358.78 640,-395 ; 623.78,-378.78 640,-395 ; 645.92,-975.6 ccw(c670.32,-951.21) C23.1@670.32,-985.71 ; 648.3,-977.98 cw(c627.26,-999.02) C23.1@657.01,-999.02 ; C23.1@670.32,-1000 643.15,-972.83 U2.28@643.15,-877.24 643.15,-811.85 765,-811.85 765,-710 745,-690 ; 825,-590 640,-405 640,-395 ; 840,-630 840,-570 1066.22,-343.78 U2.75@1137.24,-343.78 ; 845,-680 845,-780 1040,-780 1076.22,-816.22 U2.50@1076.22,-877.24 ; 961.98,-780 ccw(c961.98,-736.98) v1@992.4,-767.4 ; v1@1007.6,-767.4 ccw(c1038.02,-736.98) 1038.02,-780
  Top Layer w15: U3.5@-432.2,-1207.2 U3.16@-207.8,-1207.2 ; -322.3,-1207.2 ccw(c-322.3,-1162.7) v1@-290.83,-1194.17 ; v1@-279.17,-1194.17 ccw(c-247.7,-1162.7) -247.7,-1207.2 ; v1@-160,-1083.25 cw(c-160,-1103.16) -145.92,-1089.08 cw(c-131.84,-1075) v1@-151.75,-1075 ; v1(-160,-1075) -115,-1120 R18.2@-80.32,-1120 ; R18.2@-87.96,-1127.64 ccw(c-106.41,-1146.09) -106.41,-1120 ccw(c-106.41,-1093.91) R18.2@-87.96,-1112.36
  Top Layer w20: R36.2@-896.19,-1466.86 cw(c-910.37,-1481.04) -890.32,-1481.04 cw(c-870.26,-1481.04) R36.2@-884.44,-1466.86 ; R36.2@-896.19,-1453.14 ccw(c-910.37,-1438.96) -890.32,-1438.96 ccw(c-870.26,-1438.96) R36.2@-884.44,-1453.14 ; R35.2@-896.19,-1371.86 cw(c-910.37,-1386.04) -890.32,-1386.04 cw(c-870.26,-1386.04) R35.2@-884.44,-1371.86 ; R35.2@-890.32,-1365 R36.2@-890.32,-1460 -890.32,-1518.92 -869.23,-1540 pad.6@-595,-1540 ; pad.6@-634.14,-1554.14 ccw(c-668.28,-1588.28) -668.28,-1540 ccw(c-668.28,-1491.72) pad.6@-634.14,-1525.86 ; pad.6@-620,-1520 ccw(c-620,-1375.15) P5.3@-517.57,-1477.57 ; pad.6@-604,-1552 cw(c-580,-1570) -580,-1540 ; pad.6@-604,-1528 ccw(c-580,-1510) -580,-1540 ; -585.86,-1545.86 cw(c-620,-1511.72) -620,-1560 cw(c-620,-1668.64) -543.18,-1591.82 ; -577.32,-1557.68 ccw(c-620,-1600.36) pad.6@-620,-1540 ccw(c-620,-1443.43) -551.72,-1511.72 ; P5.3@-519.53,-1460 cw(c-566.67,-1460) -533.34,-1493.34 cw(c-500,-1526.67) P5.3@-500,-1479.53 ; P5.3@-486.19,-1473.81 cw(c-452.86,-1507.14) -452.86,-1460 cw(c-452.86,-1412.86) P5.3@-486.19,-1446.19 ; R4.2@-406.18,-1484.14 ccw(c-390.32,-1468.28) R4.2@-390.32,-1490.71 ; R4.2@-403.8,-1486.51 cw(c-416.3,-1499.02) R4.2@-398.62,-1499.02 ; R5.2@-396.19,-1645.87 ccw(c-410.37,-1660.06) -410.37,-1640 ccw(c-410.37,-1619.94) R5.2@-396.19,-1634.13 ; R5.2@-390.32,-1630.71 ccw(c-390.32,-1608.28) R5.2@-374.45,-1624.14 ; R4.2@-390.32,-1500 -430.32,-1460 P5.3@-500,-1460 -580,-1540 ; R5.2@-382.01,-1639.02 cw(c-364.33,-1639.02) R5.2@-376.83,-1626.51 ; -260.18,-1509.87 ccw(c-310.05,-1460) P6.3@-239.53,-1460 ; -236.8,-1486.49 cw(c-220,-1503.29) P6.3@-220,-1479.53 ; P6.3@-220,-1460 -220,-1469.68 R5.2@-390.32,-1640 -438.32,-1640 -463.84,-1614.47 -520.53,-1614.47 pad.6@-595,-1540 ; pad.6@-595,-1540 -580,-1540
  Top Layer w30: VR2.2@-296.89,60 v1(-165,60) -105.32,60 ; VR2.2@-254.39,36.87 cw(c-198.56,-18.96) -198.56,60 ; VR2.2@-254.39,76.91 ccw(c-213.58,117.72) -213.58,60 ; C9.2@-90.32,215 C8.2@-90.32,120 -90.32,75 -105.32,60 ; pad.1@94.39,49.39 ccw(c68.79,23.79) 68.79,60 ccw(c68.79,96.21) pad.1@94.39,70.61 ; pad.1@115.61,49.39 cw(c141.21,23.79) 141.21,60 cw(c141.21,96.21) pad.1@115.61,70.61 ; R43.2@345,-9.68 345,60 ; 539.36,60 ccw(c539.36,169.34) C20.1@616.68,92.02 ; C20.1@623.32,92.02 ccw(c700.64,169.34) pad.2@700.64,60 ; pad.2@699.39,49.39 ccw(c673.79,23.79) 673.79,60 ccw(c673.79,96.21) pad.2@699.39,70.61 ; pad.2@720.61,49.39 cw(c746.21,23.79) 746.21,60 cw(c746.21,96.21) pad.2@720.61,70.61 ; 1259.36,60 ccw(c1259.36,169.34) C22.1@1336.68,92.02 ; C22.1@1343.56,91.76 ccw(c1410,145.37) pad.21@1410,60 345,60 ; pad.21@1399.39,49.39 ccw(c1373.79,23.79) 1373.79,60 ccw(c1373.79,96.21) pad.21@1399.39,70.61 ; -105.32,60 345,60
  Top Layer w50: VR2.2@-312.95,69.84 ccw(c-344.2,101.09) -300,101.09 ccw(c-255.8,101.09) VR2.2@-287.05,69.84 ; VR2.2@-300,56.89 VR2.2@-300,293.11
  Bottom Layer w15: v1(-285,-1200) -160,-1200 ; v1@-279.17,-1205.83 cw(c-265.09,-1219.91) -265.09,-1200 cw(c-265.09,-1180.09) v1@-279.17,-1194.17
  Bottom Layer w30: P6.3@-220,-1460 -160,-1400 -160,-1200 P7.4@-160,-980 -160,55 v1(-165,60) ; P6.3@-220,-1445.47 ccw(c-220,-1410.4) -195.2,-1435.2 ccw(c-170.4,-1460) P6.3@-205.47,-1460 ; P7.4@-170.27,-990.27 cw(c-195.07,-1015.07) -160,-1015.07 cw(c-124.93,-1015.07) P7.4@-149.73,-990.27 ; P7.4@-170.27,-969.73 ccw(c-195.07,-944.93) -160,-944.93 ccw(c-124.93,-944.93) P7.4@-149.73,-969.73
  Bottom Layer w50: v1(1020,-615) 1020,-195 1100,-115 P9.4@1100,-100 v1(1100,55) ; 1020,-531.59 cw(c1077.06,-531.59) C31.1@1036.71,-491.24 ; 1020,-428.41 ccw(c1077.06,-428.41) C31.1@1036.71,-468.76 ; 1081.66,-133.34 ccw(c1048.33,-100) P9.4@1095.47,-100
  other v1: 1000,-775 1030,-725 1015,-670
V5: C6.2 C7.2 R6.2 R13.1 R25.1 R26.1 R37.2 VR1.2 | length 3343.9
  Top Layer w20: R26.1@-1367.32,-478.15 ccw(c-1388.22,-457.25) -1358.66,-457.25 ccw(c-1329.1,-457.25) R26.1@-1350,-478.15 ; R26.1@-1358.66,-500 -1358.66,-433.66 v1(-1350,-425) -1215,-425 -1174.68,-465.32 R37.2@-1135,-465.32 ; -1358.66,-459.79 cw(c-1315.21,-459.79) v1@-1345.94,-429.06 ; R37.2@-1141.86,-471.19 ccw(c-1156.04,-485.37) -1156.04,-465.32 ccw(c-1156.04,-445.26) R37.2@-1141.86,-459.44
  Top Layer w30: R25.1@-1358.66,-115 -1358.66,-38.66 v1(-1345,-25) ; -1358.66,-59.79 cw(c-1310.21,-59.79) v1@-1344.47,-25.53 ; v1(-1345,-900) -1343.25,-901.75 -1136.43,-901.75 R6.2@-1135,-900.32 ; v1(-1345,305) -1339,311 -1235,311 ; v1@-1344.47,304.47 cw(c-1328.71,288.71) -1328.71,311 ; C6.2@-1235,129.69 -1235,311 ; -1235,145.28 ccw(c-1211.02,145.28) C6.2@-1227.98,128.32 ; -1235,244.72 cw(c-1211.02,244.72) C7.2@-1227.98,261.68 ; -1235,285.28 ccw(c-1211.02,285.28) C7.2@-1227.98,268.32 ; R37.2@-1141.67,-465.32 R37.2@-1135,-465.32 ; -1037.12,311 cw(c-1037.12,181.58) VR1.2@-945.61,273.09 ; VR1.2@-917.89,311 -1235,311
  Top Layer w50: VR1.2@-912.95,280.16 cw(c-944.2,248.91) -900,248.91 cw(c-855.8,248.91) VR1.2@-887.05,280.16 ; VR1.2@-900,56.89 VR1.2@-900,293.11 R13.1@-696.77,293.11 ; VR1.2@-861.46,280.16 cw(c-830.21,248.91) -830.21,293.11 cw(c-830.21,337.31) VR1.2@-861.46,306.06
  Bottom Layer w30: v1(-1345,-900) v1(-1345,-25) v1(-1345,305)
V12: C13.2 D1.2 J1.1 pad.0@-485,55 pad.3@-1560,570 R12.1 R15.2 R19.2 | length 3667.6
  Top Layer w50: C13.2@-1640.04,397.82 ccw(c-1494.86,397.82) D1.2@-1597.52,295.16 ; pad.3@-1556.46,566.46 cw(c-1520.56,530.56) -1520.56,581.34 ; R15.2@-1380,581.34 -1543.66,581.34 -1640.04,484.96 C13.2@-1640.04,410 -1640.04,317.36 D1.2@-1607.68,285 -1607.68,187.68 -1590,170 -1490,170 -1360,40 -1155,40 -1081.34,-33.66 -561.34,-33.66 ; -576.25,-33.66 cw(c-576.25,-101.25) v1@-528.46,-53.46 ; -561.34,-18.75 ccw(c-493.75,-18.75) v1@-541.54,-66.54 ; R12.1@-561.34,55 -561.34,-33.66 ; v1@-541.54,-53.46 cw(c-493.75,-101.25) -493.75,-33.66 ; v1@-538.77,-68.45 cw(c-523.24,-33.66) -561.34,-33.66 ; v1(-535,-580) -445.75,-580 -445.46,-579.71 -300.29,-579.71 J1.1@-300,-580 ; v1(-535,-60) -561.34,-33.66 ; R19.2@-103.98,-33.66 -561.34,-33.66 ; -561.34,-33.66 cw(c-561.34,-71.76) -526.55,-56.23 ccw(c-561.34,-71.76) -561.34,-33.66
  Bottom Layer w50: v1(-535,-580) v1(-535,-60) -535,-55 -485,-5 pad.0@-485,55
pads on no net: U2.1 U2.2 U2.3 U2.4 U2.5 U2.7 U2.8 U2.9 U2.15 U2.16 U2.17 U2.18 U2.23 U2.30 U2.31 U2.32 U2.33 U2.34 U2.35 U2.36 U2.37 U2.38 U2.39 U2.40 U2.41 U2.42 U2.43 U2.44 U2.45 U2.46 U2.47 U2.48 U2.51 U2.52 U2.53 U2.54 U2.57 U2.58 U2.59 U2.60 U2.61 U2.62 U2.63 U2.64 U2.65 U2.66 U2.67 U2.68 U2.69 U2.70 U2.71 U2.77 U2.78 U2.79 U2.80 U2.81 U2.82 U2.83 U2.84 U2.85 U2.88 U2.89 U2.90 U2.91 U2.95 U2.97 U2.98 U3.13 U3.14 U6.1 U6.5 Y2.2 Y2.4

## Polygon pours and split planes (outlines as drawn)
GND on Bottom Layer "Top Layer-No Net" (hatched 90Degree grid 15 track 10): -1995,1965 -1990,1970 -1060,1970 -1060,1325 -1000,1265 -890,1155 -890,1130 -890,825 -855,790 -775,710 -775,705 -775,385 -765,375 -760,370 -165,370 -165,310 -105,250 -30,175 340,175 1895,175 1905,165 1895,155 1895,-1945 -1865,-1945 -2045,-1765
AGND on Bottom Layer "Top Layer-No Net" (hatched 90Degree grid 15 track 10): -920,2015 -880,2055 1900,2055 1900,240 1890,230 1865,255 115,255 55,255 -140,450 -190,500 -745,500 -745,1285

## Keep-outs
Keep-Out Layer:
  circle w10: c0,0 r1800.17

## Other copper
Top Layer:
  rectangle net V3.3: 615,-735 675,-685
  rectangle net V3.3: 660,-720 1060,-575
  rectangle net V3.3: 785,-800 1060,-615
Bottom Layer:
  rectangle net GND: 630,-800 955,-350
  rectangle net V3.3: 980,-795 1055,-580

## Silkscreen, mask and mechanical layers (free items; w line width, h text height)
Top Overlay:
  text "A2 A3" at 1480,920 h60 r270
  text "AE2" at 1155,260 h48
  text "AE3" at 1590,235 h48
  text "G C D V" at 770,-25 h54
  text "25M" at 75,-545 h48
  text "U3 R T" at 1555,-595 h48 r270
  text "R" at 235,-685 h48
  text "G C D V" at -495,-910 h54
  text "R" at -770,-1000 h60
  text "A0" at -815,-1130 h60
  text "A1" at -810,-1240 h60
  text "XDM-I Tube03" at 330,-1280 h60
  text "20180703" at 410,-1375 h60